# EAGLE board source_eagle (EAGLE 9.6.2)
REV: B
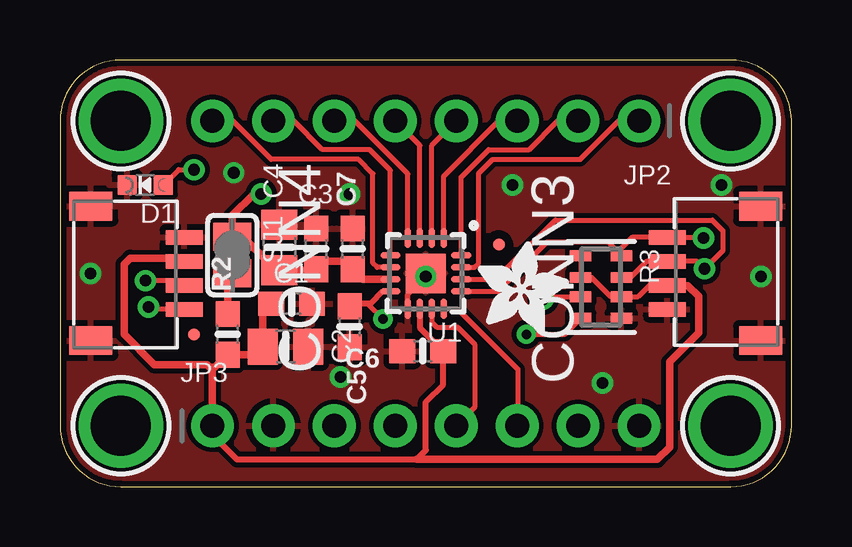
[diagram p0: board, top side]
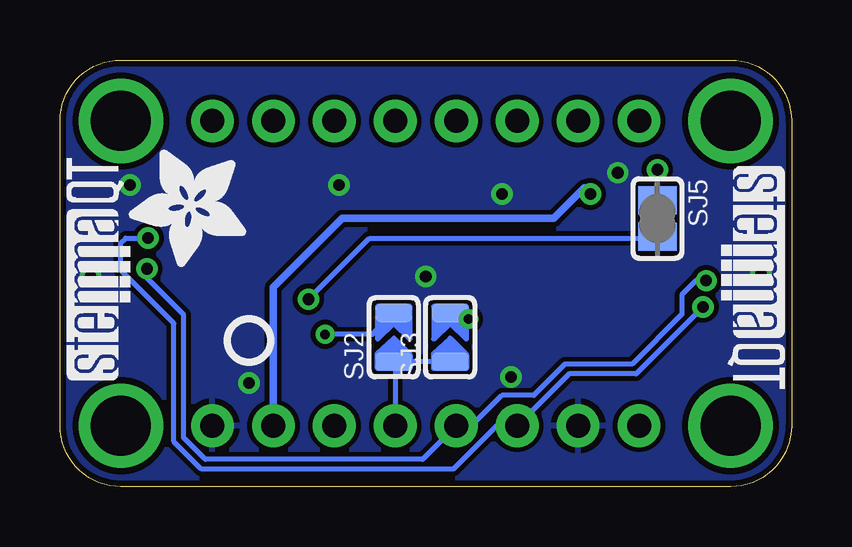
[diagram p1: board, bottom side, seen from below]

Size 30.48 x 17.78 mm. Coordinates in mm from the lower left corner, seen from the top.
Outline: 0,15.24 0,2.54 arc90 2.54,0 27.94,0 arc90 30.48,2.54 30.48,15.24 arc90 27.94,17.78 2.54,17.78 arc90 0,15.24
Copper layers (1*16): Top 0.035mm / dielectric 1.5mm / Bottom 0.035mm
Design rules "adafruit *": minimum track width 8mil, minimum drill 15.5mil, track to track 8mil, track to pad 8mil, pad to pad 8mil, via to via 8mil, smd to smd 8mil, copper to edge 10mil, drill to drill 8mil, minimum pad ring 10mil, minimum via ring 8mil, stop-mask expansion 2mil, vias tented up to drill 20mil, thermal gap 10mil
Net classes: 1 highpower: width 0.305 mm, drill 0.483 mm; 2 lowpower: width 0.254 mm, drill 0.483 mm

## Footprints (pad centres in the part's own frame; a part is rotated, then mirrored left to right if it is on the bottom)
0603-NO = smd 1.075 x 1: 1 -0.85,0; 2 0.85,0
0805-NO = smd 1.24 x 1.5: 1 -0.95,0; 2 0.95,0
JST_SH4 = smd 0.6 x 1.55: 1 -1.5,2.006; 2 -0.5,2.006; 3 0.5,2.006; 4 1.5,2.006 | smd 1.2 x 1.8: MT1 -2.8,-1.894; MT2 2.8,-1.894
CHIPLED_0603_NOOUTLINE = smd 0.8 x 0.8: A 0,-0.75; C 0,0.75
FIDUCIAL_0.5MM = smd 0.5 x 0.5: 1 0,0
1X08_ROUND_70 = drill 1 pad 1.778: 1 -8.89,0; 2 -6.35,0; 3 -3.81,0; 4 -1.27,0; 5 1.27,0; 6 3.81,0; 7 6.35,0; 8 8.89,0
RESPACK_4X0603 = smd 0.45 x 0.9: 1 -1.3,-0.85; 2 -0.4,-0.85; 3 0.4,-0.85; 4 1.3,-0.85; 5 1.3,0.85; 6 0.4,0.85; 7 -0.4,0.85; 8 -1.3,0.85
SOLDERJUMPER_CLOSEDWIRE = smd 1.168 x 1.6: 1 -0.762,0; 2 0.762,0 | smd 0.635 x 0.203: WIRE 0,0
SOLDERJUMPER_ARROW_NOPASTE = smd 0.762 x 1.524: 1 -1.016,0; 2 1.016,0
WQFN16 = smd 0.28 x 0.85: 1 -0.75,-1.475; 2 -0.25,-1.475; 3 0.25,-1.475; 4 0.75,-1.475; 9 0.75,1.475; 10 0.25,1.475; 11 -0.25,1.475; 12 -0.75,1.475 | smd 0.85 x 0.28: 5 1.475,-0.75; 6 1.475,-0.25; 7 1.475,0.25; 8 1.475,0.75; 13 -1.475,0.75; 14 -1.475,0.25; 15 -1.475,-0.25; 16 -1.475,-0.75 | smd 1.65 x 1.65: THERM 0,0
MOUNTINGHOLE_2.5_PLATED = drill 2.5 pad 3.2: P$1 0,0

## Placement (x,y rotation side)
C1  0.1uF  [0603-NO]  9.65,7.62 0 top
C2  10uF  [0805-NO]  9.4,5.84 0 top
C3  0.1uF  [0603-NO]  10.67,9.91 90 top
C4  10uF  [0805-NO]  9.14,9.97 90 top
C5  1uF  [0603-NO]  12.06,6.67 270 top
C6  1uF  [0603-NO]  15.11,5.65 180 top
C7  1uF  [0603-NO]  12.19,9.91 90 top
CONN3  STEMMA_I2C_QT  [JST_SH4]  27.3,8.89 90 top
CONN4  STEMMA_I2C_QT  [JST_SH4]  3.17,8.89 270 top
D1  GREEN  [CHIPLED_0603_NOOUTLINE]  3.56,12.57 90 top
FID3  FIDUCIAL_0.5MM  [FIDUCIAL_0.5MM]  5.59,6.35 0 top
FID4  FIDUCIAL_0.5MM  [FIDUCIAL_0.5MM]  18.29,10.1 0 top
JP2  [1X08_ROUND_70]  15.24,15.24 180 top
JP3  [1X08_ROUND_70]  15.24,2.54 0 top
PLABEL0  [PLABEL0]  6.35,0.89 0 top
PLABEL2  [PLABEL2]  8.89,4.19 0 top
PLABEL3  [PLABEL3]  11.56,0.89 0 top
PLABEL4  [PLABEL4]  14.1,4.19 0 top
PLABEL7  [PLABEL7]  0.38,12.45 0 top
PLABEL10  [PLABEL10]  6.35,17.02 0 top
PLABEL11  [PLABEL11]  8.89,17.02 0 top
PLABEL12  [PLABEL12]  11.43,17.02 0 top
PLABEL13  [PLABEL13]  13.97,17.02 0 top
PLABEL14  [PLABEL14]  16.51,17.02 0 top
PLABEL15  [PLABEL15]  21.59,17.02 0 top
PLABEL16  [PLABEL16]  24.13,17.02 0 top
PLABEL17  [PLABEL17]  19.05,17.02 0 top
PLABEL20  [PLABEL20]  15.24,0.89 0 bottom
PLABEL25  [PLABEL25]  3.75,11.43 90 bottom
PLABEL26  [PLABEL26]  13.91,13.34 0 top
PLABEL27  [PLABEL27]  22.8,12.95 0 top
PLABEL28  [PLABEL28]  18.92,11.49 0 top
PLABEL29  [PLABEL29]  16.51,0.95 0 top
PLABEL30  [PLABEL30]  19.05,4.19 0 top
PLABEL31  [PLABEL31]  21.59,0.89 0 top
PLABEL32  [PLABEL32]  24.13,4.25 0 top
PLABEL33  [PLABEL33]  6.99,12.13 0 top
PLABEL34  [PLABEL34]  18.35,6.35 90 bottom
PLABEL35  [PLABEL35]  12.45,6.35 90 bottom
PLABEL36  [PLABEL36]  11.05,4.25 0 bottom
PLABEL37  [PLABEL37]  15.68,13.02 0 bottom
PLABEL38  [PLABEL38]  15.11,9.91 0 bottom
R2  5ohm  [0603-NO]  6.99,6.35 90 top
R3  10K Pack  [RESPACK_4X0603]  22.54,8.32 270 top
SJ1  [SOLDERJUMPER_CLOSEDWIRE]  7.18,9.65 270 top
SJ2  [SOLDERJUMPER_ARROW_NOPASTE]  16.57,6.22 90 bottom
SJ3  [SOLDERJUMPER_ARROW_NOPASTE]  14.22,6.22 90 bottom
SJ5  [SOLDERJUMPER_CLOSEDWIRE]  5.59,11.18 270 bottom
U1  ADS7128  [WQFN16]  15.24,8.89 180 top
U$1  MOUNTINGHOLE2.5  [MOUNTINGHOLE_2.5_PLATED]  2.54,15.24 0 top
U$17  MOUNTINGHOLE2.5  [MOUNTINGHOLE_2.5_PLATED]  27.94,15.24 0 top
U$19  MOUNTINGHOLE2.5  [MOUNTINGHOLE_2.5_PLATED]  2.54,2.54 0 top
U$21  MOUNTINGHOLE2.5  [MOUNTINGHOLE_2.5_PLATED]  27.94,2.54 0 top
U$22  [ADAFRUIT_3.5MM]  17.4,6.41 0 top
U$25  [PCBFEAT-REV-040]  22.61,6.1 0 bottom
U$27  [ADAFRUIT_5MM]  22.73,14.03 180 bottom
U$30  [STEMMAQT]  27.56,4.45 90 bottom
U$31  [STEMMAQT]  2.92,13.34 270 bottom

## Library data of the parts
C1-C7 FID3 FID4 JP2 JP3 R2 R3 SJ1 SJ5 U$22 U$25 U$27 = microbuilder
CONN3 CONN4 = adafruit_electromech; LCSC: C2905006
D1 = microbuilder; ROT: 270
PLABEL0 PLABEL2-PLABEL4 PLABEL7 PLABEL10-PLABEL17 PLABEL20 PLABEL25-PLABEL38 = pinguin
SJ2 SJ3 = microbuilder; BOM: EXCLUDE
U1 = adafruit_sensor; DESCRIPTION: ADS7128 12-bit 8-Channel I2C ADC with GPIOs, CRC, and RMS; MF: Texas Instruments; MP: ADS7128IRTER; PACKAGE: WQFN-16 3.0x3.0mm
U$1 U$17 U$19 U$21 = adafruit_electromech; BOM: EXCLUDE
U$30 U$31 = silks

## Nets
A0: JP2.1 U1.15
A1: JP2.2 U1.16
A2: JP2.3 U1.1
A3: JP2.4 U1.2
A4: JP2.5 U1.3
A5: JP2.6 U1.4
A6: JP2.7 U1.5
A7: JP2.8 U1.6
ADDR: JP3.5 SJ2.1 SJ3.1 U1.11
ALERT: JP3.6 U1.12
AVDD [highpower]: C3.1 C4.1 C7.1 JP3.7 SJ1.1 U1.7
DECAP: C5.1 SJ3.2 U1.8
DVDD: C1.1 C2.1 C6.1 CONN3.2 CONN4.2 JP3.1 R2.1 R3.1 R3.2 R3.6 U1.10
GND [highpower]: C1.2 C2.2 C3.2 C4.2 C5.2 C6.2 C7.2 CONN3.1 CONN3.MT1 CONN3.MT2 CONN4.1 CONN4.MT1 CONN4.MT2 D1.C JP3.2 JP3.8 R3.5 U1.9 U1.THERM
N$1: D1.A SJ5.1
N$2: R3.3 SJ5.2
N$3: R2.2 SJ1.2
N$4: R3.4 SJ2.2
SCL: CONN3.4 CONN4.4 JP3.3 R3.8 U1.13
SDA: CONN3.3 CONN4.3 JP3.4 R3.7 U1.14

## Tracks (layer width: path | path; a pad name or v marks a point on that pad's centre or on a via)
A0
  Top 0.203: U1.15 17.27,9.14 17.45,9.32 17.45,13.06 18.02,13.64 21.68,13.64 23.28,15.24 JP2.1
A1
  Top 0.203: U1.16 16.71,12.9 17.86,14.05 19.54,14.05 20.74,15.24 JP2.2
A2
  Top 0.203: U1.1 15.99,12.94 18.29,15.24 JP2.3
A3
  Top 0.203: U1.2 15.49,14.22 JP2.4
A4
  Top 0.203: U1.3 14.99,14.22 JP2.5
A5
  Top 0.203: U1.4 14.49,13.03 12.28,15.24 JP2.6
A6
  Top 0.203: U1.5 13.77,13.18 12.9,14.05 10.94,14.05 9.74,15.24 JP2.7
A7
  Top 0.203: U1.6 13.21,9.14 13.04,9.32 13.04,13.05 12.45,13.64 8.8,13.64 7.2,15.24 JP2.8
ADDR
  Top 0.203: U1.11 15.49,6.86 15.71,6.65 16.56,6.65 17.27,5.94 17.27,3.3 JP3.5
  Bottom 0.203: SJ2.1 16.51,5.14 16.51,4.64 | 16.51,4.64 JP3.5 | SJ3.1 15.94,5.21 16.51,4.64
ALERT
  Top 0.203: JP3.6 19.07,2.56 19.07,4.9 16.56,7.42 U1.12
AVDD  (via drill 0.48)
  Top 0.305: U1.7 12.61,8.64 C7.1 11.85,9.4 10.67,9.4 C3.1 10.63,9.02 C4.1 9.01,9.02 7.62,10.41 SJ1.1 7.18,11.31 8.06,12.2 v8.38,12.2
  Bottom 0.305: JP3.7 21.59,8.32 18.73,11.18 9.91,11.18 8.64,12.45 v8.38,12.2
DECAP  (via drill 0.39)
  Top 0.203: 12.83,7.63 v13.46,7 v13.46,6.99
  Top 0.254: U1.8 13.45,8.14 12.94,7.63 12.83,7.63 12.18,7.63 C5.1
  Bottom 0.203: SJ3.2 13.72,7.24 v13.46,6.99
DVDD
  Top 0.203: R3.1 R3.2 22.14,8.72 22.94,7.92 R3.6 24.09,7.92 24.56,8.39 CONN3.2
  Top 0.254: U1.10 14.99,6.62 C6.1 15.96,4.25 15.24,3.53 15.24,1.52 14.86,1.14 7.37,1.14 6.35,2.16 JP3.1
  Top 0.305: C1.1 8.45,7.27 C2.1 8.11,5.5 R2.1 6.46,4.97 6.24,4.97 | JP3.1 6.35,4.87 6.24,4.97 | 14.86,1.14 24.89,1.14 25.4,1.65 25.4,5.21 26.61,6.41 26.61,7.94 26.16,8.38 CONN3.2 | CONN4.2 5.05,9.53 2.92,9.53 2.67,9.27 2.67,6.35 3.94,5.08 6.13,5.08 6.24,4.97
GND  (via drill 0.48)
  Top 0.203: U1.9 14.49,8.01 v15.24,8.76 U1.THERM
  other vias: 29.21,8.76 1.27,8.89 12.06,12.19 7.24,13.08 22.61,4.32 11.68,4.57 18.86,12.57 27.56,12.57
  pour Top: 0,17.78 30.48,17.78 30.48,0 0,0
  pour Bottom: 0,17.78 30.48,17.78 30.48,0 0,0
N$1  (via drill 0.48)
  Top 0.203: D1.A 4.94,13.21 v5.59,13.21
  Bottom 0.203: v5.59,13.21 SJ5.1
N$2  (via drill 0.48)
  Top 0.203: v20.13,7.81 20.13,7.92 R3.3
  Bottom 0.203: SJ5.2 5.65,10.35 17.59,10.35 v20.13,7.81
N$3
  Top 0.305: R2.2 6.99,8.7 SJ1.2
N$4  (via drill 0.39)
  Top 0.203: R3.4 21.02,6.35 v19.43,6.35
  Bottom 0.203: SJ2.2 17.46,6.35 v19.43,6.35
SCL  (via drill 0.48)
  Top 0.203: U1.13 18.24,8.14 20.3,10.2 22.81,10.2 R3.8 23.39,9.94 23.84,10.39 CONN3.4 26.78,10.39 v26.81,10.36 | CONN4.4 3.79,7.39 v3.68,7.49
  Bottom 0.203: v3.68,7.49 6.48,4.7 9.27,4.7 JP3.3 12.28,2.54 14.09,0.74 24.59,0.74 25.73,1.88 25.73,6.81 27.94,9.02 27.94,10.16 27.74,10.36 v26.81,10.36
SDA  (via drill 0.48)
  Top 0.203: R3.7 23.77,8.72 24.45,9.39 CONN3.3 26.55,9.39 v26.86,9.08 27.62,9.84 27.62,10.67 27.18,11.11 20.64,11.11 18.16,8.64 U1.14 | CONN4.3 4.99,8.59 v3.56,8.59
  Bottom 0.203: v3.56,8.59 3.99,8.59 4.57,8 4.57,7.18 6.64,5.11 9.44,5.11 10.73,3.81 12.06,3.81 13.34,2.54 JP3.4 15.37,1.14 24.42,1.14 25.32,2.05 25.32,7.16 26.86,8.7 v26.86,9.08

## Text on the board
Pinguin_tBackup: A7 | A6 | A5 | A4 | A3 | A2 | A1 | A0 | ADS7128 | ADS7830 | 12-bit ADC | on | AVDD | & GPIO expander | GND | SDA | ALRT | COM | GND | AD1 | VIN | SCL | ADDR | REF | AVDD | AD0
Pinguin_bBackup: ADS7128 | ADS7830 | 8 Channel 8-bit ADC | LED | 8-Channel 12-Bit / ADC+GPIO Expander | Ext Ref | AD0 | AD1 | 0x17 | Ext Com | 0x11 | Default I2C / Addr: 0x10 | VLogic/Vcc: 3-5VDC